# Altium PCB HZSneckV1.2.PcbDoc (part 1 of 2)
Units mm, origin at the board's own origin, x right, y up, seen from the top; angles counter-clockwise.
Board outline 366.25 x 25 mm, 2 copper layers (Top Layer, Bottom Layer), stack 0.251 mm thick; 58 components, 49 nets, 275 pads, 127 vias.
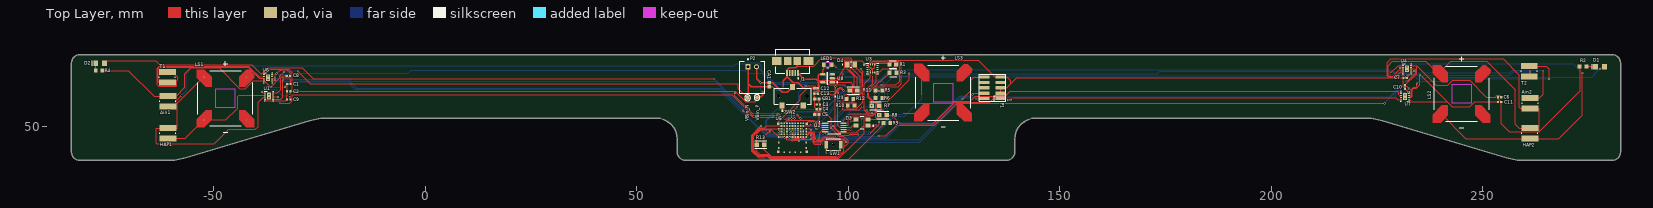
[diagram p0: Top Layer view]
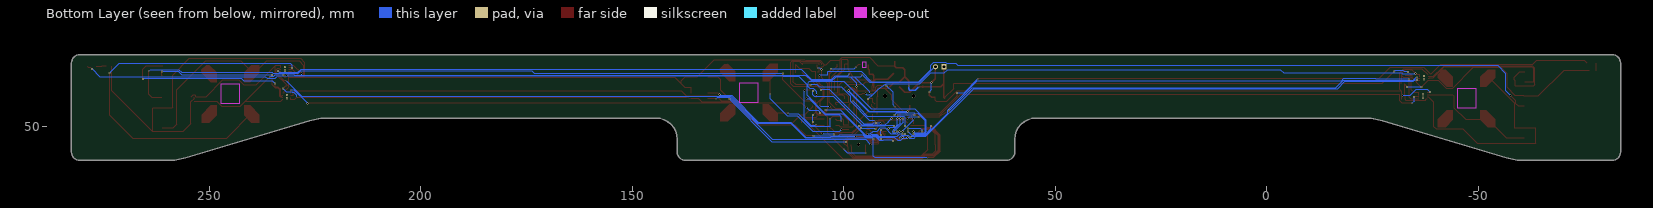
[diagram p1: Bottom Layer view, seen from below]

## Layer stack, top to bottom
Flex Bottom Coverlay: solder mask 0.0254, SM-001, Dk 4
Flex Bottom Coverlay: solder mask 0.025, FC-001, Dk 4
Stiffener 1: core 0.1, Core-009, Dk 4.5
Flex Bottom Coverlay: solder mask 0.012, FC-001, Dk 4
Adhesive 1: prepreg 0.025, PP-001, Dk 3.9
Top Layer: signal copper 0.018
Adhesive 2: prepreg 0.02, PP-001, Dk 3.9
Dielectric 1: dielectric 0.025, FR-4, Dk 4.8
Adhesive 3: prepreg 0.02, PP-001, Dk 3.9
Bottom Layer: signal copper 0.018
Adhesive 4: prepreg 0.025, PP-006, Dk 4.1
Board Layer Stack Bottom Solder: solder mask 0.012, FC-001, Dk 4
Board Layer Stack Bottom Solder: solder mask 0.025, FC-001, Dk 4
Board Layer Stack Bottom Solder: solder mask 0.0254, SM-001, Dk 4

## Board outline
-81.698,41.889 -60.933,41.889 -60.391,41.899 -59.85,41.928 -59.31,41.977 -58.772,42.046 -58.238,42.134 -57.706,42.242 -57.179,42.369 -56.657,42.514 -27.377,51.264 -26.855,51.41 -26.328,51.536 -25.796,51.644 -25.261,51.732 -24.724,51.801 -24.184,51.85 -23.643,51.879 -23.101,51.889 54.535,51.889 55.508,51.793 56.444,51.508 57.307,51.046 58.062,50.425 58.683,49.667 59.144,48.802 59.428,47.864 59.524,46.889 59.524,43.889 59.562,43.499 59.676,43.124 59.86,42.778 60.108,42.475 60.41,42.226 60.755,42.041 61.13,41.927 61.519,41.889 137.347,41.889 137.737,41.927 138.111,42.041 138.456,42.226 138.758,42.475 139.007,42.778 139.191,43.124 139.304,43.499 139.343,43.889 139.343,46.889 139.439,47.864 139.723,48.802 140.184,49.667 140.804,50.425 141.56,51.046 142.422,51.508 143.358,51.793 144.332,51.889 221.967,51.889 222.509,51.879 223.05,51.85 223.59,51.801 224.128,51.732 224.663,51.644 225.194,51.536 225.721,51.41 226.243,51.264 255.523,42.514 256.046,42.369 256.573,42.242 257.104,42.134 257.639,42.046 258.176,41.977 258.716,41.928 259.258,41.899 259.799,41.889 280.564,41.889 280.953,41.927 281.328,42.041 281.673,42.226 281.975,42.475 282.223,42.778 282.408,43.124 282.521,43.499 282.559,43.889 282.559,64.889 282.521,65.279 282.408,65.654 282.223,66 281.975,66.303 281.673,66.552 281.328,66.737 280.953,66.851 280.564,66.889 -81.698,66.889 -82.087,66.851 -82.461,66.737 -82.806,66.552 -83.109,66.303 -83.357,66 -83.541,65.654 -83.655,65.279 -83.693,64.889 -83.693,43.889 -83.655,43.499 -83.541,43.124 -83.357,42.778 -83.109,42.475 -82.806,42.226 -82.461,42.041 -82.087,41.927

## Design rules (kind name [scope] priority, off if disabled: settings)
BoardOutlineClearance [All] p1: gap=0.2 ignorepadtopadclearanceinfootprint=FALSE
Clearance [All] p1: gap=0.1 ignorepadtopadclearanceinfootprint=TRUE
ComponentClearance [All] p1: gap=0.127 collisioncheckmode=3 verticalgap=0.127 showdistances=TRUE
DiffPairsRouting [All] p1: maxlimit=0.254 minlimit=0.127 mostfreqgap=0.127 substack1={524825A5-2011-4F06-AE5B-80F377F077C6} toplayer_{524825a5-2011-4f06-ae5b-80f377f077c6}_minwidth=0.381 toplayer_{524825a5-2011-4f06-ae5b-80f377f077c6}_maxwidth=0.381 toplayer_{524825a5-2011-4f06-ae5b-80f377f077c6}_prefwidth=0.381 bottomlayer_{524825a5-2011-4f06-ae5b-80f377f077c6}_minwidth=0.381 bottomlayer_{524825a5-2011-4f06-ae5b-80f377f077c6}_maxwidth=0.381 bottomlayer_{524825a5-2011-4f06-ae5b-80f377f077c6}_prefwidth=0.381 toplayer_minwidth=0.127 toplayer_maxwidth=25.4 toplayer_prefwidth=0.127 bottomlayer_minwidth=0.127 bottomlayer_maxwidth=25.4 bottomlayer_prefwidth=0.127 maxuncoupledlength=12.7
Height [All] p1: minheight=0 maxheight=1816.048 prefheight=12.7
HoleSize [All] p1: absolutevalues=TRUE maxlimit=6.3 minlimit=0.15 maxpercent=80.000 minpercent=20.000
HoleToHoleClearance [All] p1: gap=0.254 allowstackedmicrovias=FALSE
MinimumAnnularRing [All] p1: minimumring=0.15
MinimumSolderMaskSliver [All] p1: minsoldermaskwidth=0.152
PlaneClearance [All] p1: clearance=0.127
PlaneConnect PlaneConnectPowerPads [InPadClass('PowerPads')] p1: planeconnectstyle=Direct reliefexpansion=0.508 reliefentries=4 reliefconductorwidth=0.254 reliefairgap=0.254
PlaneConnect [All] p2: pad.planeconnectstyle=Relief pad.reliefexpansion=0.3 pad.reliefentries=4 pad.reliefconductorwidth=0.127 pad.reliefairgap=0.127 via.planeconnectstyle=Direct via.reliefexpansion=0.3 via.reliefentries=4 via.reliefconductorwidth=0.127 via.reliefairgap=0.127
PolygonConnect PolygonConnectPowerPads [All vs (InPadClass('PowerPads'))] p1: connectstyle=Direct reliefconductorwidth=0.254 reliefentries=4 polygonreliefangle="90 Angle" airgapwidth=0.254
PolygonConnect [All] p2: thpad.connectstyle=Relief thpad.reliefconductorwidth=0.127 thpad.reliefentries=4 thpad.polygonreliefangle="90 Angle" thpad.airgapwidth=0.127 smdpad.connectstyle=Relief smdpad.reliefconductorwidth=0.127 smdpad.reliefentries=4 smdpad.polygonreliefangle="90 Angle" smdpad.airgapwidth=0.127 via.connectstyle=Direct via.reliefconductorwidth=0.127 via.reliefentries=4 via.polygonreliefangle="90 Angle" via.airgapwidth=0.127
RoutingVias [All] p1: holewidth=0.3 width=0.6 viastyle="Through Hole" minholewidth=0.3 minwidth=0.6 maxholewidth=0.6 maxwidth=6.6
SilkToSilkClearance [All] p1: silktosilkclearance=0.127
SilkToSolderMaskClearance [IsPad] p1: minsilkscreentomaskgap=0.127 clearancetoexposedcopper=TRUE
SolderMaskExpansion [All] p1: expansion=0.051 istentingtop=FALSE
SupplyNets "Schematic Supply Nets_1" [InNet('GND')] p1: voltage=0.000
SupplyNets "Schematic Supply Nets" [InNet('VDD')] p2: voltage=0.000
UnRoutedNet [All] p1: checkbadconnections=TRUE
ViasUnderSMD [HasFootprint('Copy of ISP2053-AX')] p1: allowed=TRUE
Width [All] p1: maxlimit=0.254 minlimit=0.1 preferedwidth=0.1 substack1={524825A5-2011-4F06-AE5B-80F377F077C6}
Width Width_10mil [All] p2: maxlimit=25.4 minlimit=0.254 preferedwidth=0.254 substack1={524825A5-2011-4F06-AE5B-80F377F077C6} minimp=50.000000 maximp=50.000000 favimp=50.000000
Width Width_6mil [All] p3: maxlimit=25.4 minlimit=0.152 preferedwidth=0.152 substack1={524825A5-2011-4F06-AE5B-80F377F077C6} minimp=50.000000 maximp=50.000000 favimp=50.000000
Width Power_20mil [All] p4: maxlimit=25.4 minlimit=0.508 preferedwidth=0.508 substack1={524825A5-2011-4F06-AE5B-80F377F077C6} minimp=50.000000 maximp=50.000000 favimp=50.000000
Width Power_12mil [All] p5: maxlimit=25.4 minlimit=0.305 preferedwidth=0.305 substack1={524825A5-2011-4F06-AE5B-80F377F077C6} minimp=50.000000 maximp=50.000000 favimp=50.000000
Width Width_5mil [All] p6: maxlimit=25.4 minlimit=0.127 preferedwidth=0.127 substack1={524825A5-2011-4F06-AE5B-80F377F077C6} minimp=50.000000 maximp=50.000000 favimp=50.000000
19 further rules are at their usual default settings.

## Classes and differential pairs
differential pair PLT2: +PLT2_P -PLT2_N
differential pair PLT1: +PLT1_P -PLT1_N
differential pair HAP3: +HAP3_P -HAP3_N
differential pair HAP2: +HAP2_P -HAP2_N
differential pair HAP1: +HAP1_P -HAP1_N

## Components (designator, comment, footprint, x,y, rotation, side; value= is the part's Value field where it differs from the comment)
Ain1 "10k Thermistor Custom" "10k Thermistor Pad" -60.9,55.863 r90 top
Ain2 "10k Thermistor Custom" "10k Thermistor Pad" 261.167,55.415 r270 top
C1 "100nF" CAPC0402(1005)60_L#1 -32.259,59.953 r0 top
C2 "100nF" CAPC0402(1005)60_L#1 -32.29,58.227 r0 top
C3 "CAP 100nF 25V 0402(1005)" CAPC0402(1005)60_L#1 92.908,55.105 r180 top value=100nF
C4 "CAP 100nF 25V 0402(1005)" CAPC0402(1005)60_L#1 92.933,53.964 r0 top value=100nF
C5 "1 µF" CAPC1005X56X25ML10T15 92.566,52.762 r0 top
C6 "100nF" CAPC0402(1005)60_L#1 253.951,56.837 r0 top
C7 "100nF" CAPC0402(1005)60_L#1 231.602,61.397 r0 top
C8 "100nF" CAPC0402(1005)60_L#1 -32.384,61.867 r0 top
C9 "100nF" CAPC0402(1005)60_L#1 -32.321,56.313 r0 top
C10 "100nF" CAPC0402(1005)60_L#1 231.571,59.238 r90 top
C11 "100nF" CAPC0402(1005)60_L#1 253.946,55.723 r180 top
C12 "Capacitor 10µF +/-40% 6.3V 0402" CAPC0402(1005)60_L#2 92.367,58.933 r180 top value=10µF
C13 "Capacitor 10µF +/-40% 6.3V 0402" CAPC0402(1005)60_L#2 92.377,57.677 r0 top value=10µF
CA1 "1 µF" CAPC1005X56X25ML10T15 81.278,59.775 r90 top
CB1 "1 µF" CAPC1005X56X25ML10T15 92.568,56.429 r0 top
D1 "150080BS75000" WL-SMCW_0805_150080xx75000 277.685,64.034 r0 top
D2 "150080BS75000" WL-SMCW_0805_150080xx75000 -76.907,64.853 r0 top
D3 "LED RGB" FP-AAA3528LSEKJ3ZGKQBKS-MFG 103.233,50.853 r0 top
D4 "Green LED" LEDC2012X120N 100.611,64.56 r0 top
HAP1 "10k Thermistor Custom" "10k Thermistor Pad" -60.877,48.31 r90 top
HAP2 "10k Thermistor Custom" "10k Thermistor Pad" 261.119,48.281 r90 top
J1 "10104110-0001LF" FCI-10104110-0001LF_V 86.803,63.956 r180 top
LED1 "Red LED" "LED_LS R976_AOS" 95.092,64.543 r180 top
LS1 "HD-LA1307-SM" XDCR_HD-LA1307-SM -47.283,56.538 r0 top
LS2 "HD-LA1307-SM" XDCR_HD-LA1307-SM 244.97,57.617 r0 top
LS3 "HD-LA1307-SM" XDCR_HD-LA1307-SM 122.415,57.885 r0 top
P1 "Pin Header 2x5 SMD, 1.27mm, KS" HDR_2x5-SMD-1.27mm-K 134.072,59.055 r90 top value="Pin Header 2x5, 1.27mm"
P2 "S2B-PH-K-S(LF)(SN)" JST-S2B-PH-K-S_V 77.278,61.572 r0 top
R1 "4.7kΩ" FP-TFCR0603-MFG 110.502,64.54 r0 top
R2 "SG73P1JTTD4700F" RESC1608X55N 273.671,64.101 r180 top value=470
R3 "4.7kΩ" FP-TFCR0603-MFG 110.547,62.6 r0 top
R4 "SG73P1JTTD4700F" RESC1608X55N -77.138,63.13 r0 top value=470
R5 "SG73P1JTTD4700F" RESC1608X55N 107.229,58.434 r0 top value=470
R6 "SG73P1JTTD4700F" RESC1608X55N 107.218,56.669 r0 top value=470
R7 "10kΩ" FP-AC0603-IPC_A 106.395,54.805 r0 top
R8 "10kΩ" FP-AC0603-IPC_A 108.141,52.613 r0 top
R9 "SG73P1JTTD4700F" RESC1608X55N 109.086,50.748 r0 top value=470
R10 "SG73P1JTTD4700F" RESC1608X55N 100.648,54.881 r0 top value=470
R11 "10kΩ" FP-AC0603-IPC_A 101.189,58.432 r0 top
R12 "SG73P1JTTD4700F" RESC1608X55N 100.345,56.438 r0 top value=470
R13 "10kΩ" FP-AC0603-IPC_A 79.236,45.619 r180 top
SW1 "B3U-1000P-B" FP-B3U-1000P-B-MFG 96.453,45.598 r0 top
SW2 "CL-SB-12B-02T" FP-CL-SB-12B-02T-MFG 86.834,57.084 r0 top
T1 "Peltier 1" "10k Thermistor Pad" -60.987,61.536 r270 top
T2 "Peltier 2" "10k Thermistor Pad" 260.962,62.964 r90 top
U1 "DRV8837DSGR" DSG0008A -36.976,57.093 r0 top
U2 "DRV2605LDGST" SOP50P490X110-10N 96.671,49.673 r0 top
U3 "BMI270" XDCR_BMI270 105.725,63.598 r0 top
U4 "DRV8837DSGR" DSG0008A 232.066,63.545 r0 top
U5 "Copy of ISP2053_Pinout_New" "Copy of ISP2053-AX" 86.763,47.232 r0 top
U6 "DRV8837DSGR" DSG0008A -37.211,61.432 r0 top
U7 "DRV8837DSGR" DSG0008A 231.595,56.966 r180 top
U8 "MCP73831T-2ACI/OT" FP-C04-091-OT-IPC_B 95.081,61.288 r180 top
U9 "TPS7A0230PDQNR" IC_TPS7A0230PDQNR 97.235,58.261 r90 top
VBin_N "TP_SMD_Ø1.0MM" TP_SMD_Ø1.0mm 76.158,56.684 r90 top value=Ø1.0mm,SMD
VBin_P "TP_SMD_Ø1.0MM" TP_SMD_Ø1.0mm 78.389,56.763 r90 top value=Ø1.0mm,SMD

## Footprints (in the part's own frame and the unit in brackets; to place one, negate y for a bottom-side part, rotate by r counter-clockwise, add the part's x,y. Pads: shape width x height; smd on the part's side, far side on the other; paste and mask are expansions set on the pad)
"10k Thermistor Pad" [mm] "Custom Made FootPrint"
  rect 1.45x4 smd: 1(-1.225,0) 2(1.225,0)
  silkscreen extent -0.1,-1.9 0.1,1.9, body extent -1.57,-2 1.57,2, height 0.26
CAPC0402(1005)60_L#1 [mm] "Chip Capacitor, Body 1.0x0.5mm, Height 0.6mm, IPC High Density"
  rect 0.52x0.52 smd: 1(-0.4,0) 2(0.4,0)
  body extent -0.55,-0.3 0.55,0.3, height 0.6
CAPC0402(1005)60_L#2 [mm] "Chip Capacitor, Body 1.0x0.5mm, Height 0.6mm, IPC High Density"
  rrect25% 0.5x0.55 smd: 1(-0.45,0) 2(0.45,0)
  silkscreen extent 0,-0.2 0,0.2, body extent -0.5,-0.25 0.5,0.25, height 0.6
CAPC1005X56X25ML10T15 [mm] "Chip Capacitor, 2-Leads, Body 1.00x0.50mm, IPC Low Density"
  rect 0.78x0.74 smd: 1(-0.49,0) 2(0.49,0)
  body extent -0.55,-0.3 0.55,0.3, height 0.56
"Copy of ISP2053-AX" [mm] "Insight SiP BLE module all pins"
  rect 0.6x0.6 smd mask+0: A1(-3.35,3.35) A11(3.35,3.35) L1(-3.35,-3.35) L11(3.35,-3.35)
  rect 0.4x0.4 smd mask+0: A2(-2.6,3.45) A3(-1.95,3.45) A4(-1.3,3.45) A5(-0.65,3.45) A6(0,3.45) A7(0.65,3.45) A8(1.3,3.45) A9(1.95,3.45) A10(2.6,3.45) B2(-2.6,2.8) B3(-1.95,2.8) B4(-1.3,2.8) B5(-0.65,2.8) B6(0,2.8) B7(0.65,2.8) B8(1.3,2.8) B9(1.95,2.8) B10(2.6,2.8) C1(-3.25,2.15) C2(-2.6,2.15) C3(-1.95,2.15) C4(-1.3,2.15) C5(-0.65,2.15) C6(0,2.15) C7(0.65,2.15) C8(1.3,2.15) C9(1.95,2.15) C10(2.6,2.15) C11(3.25,2.15) D1(-3.25,1.5) D2(-2.6,1.5) D3(-1.95,1.5) D4(-1.3,1.5) D5(-0.65,1.5) D6(0,1.5) D7(0.65,1.5) D8(1.3,1.5) D9(1.95,1.5) D10(2.6,1.5) D11(3.25,1.5) E1(-3.25,0.85) E2(-2.6,0.85) E3(-1.95,0.85) E4(-1.3,0.85) E5(-0.65,0.85) E6(0,0.85) E7(0.65,0.85) E8(1.3,0.85) E9(1.95,0.85) E10(2.6,0.85) E11(3.25,0.85) F1(-3.25,0.2) F2(-2.6,0.2) F3(-1.95,0.2) F4(-1.3,0.2) F5(-0.65,0.2) F6(0,0.2) F7(0.65,0.2) F8(1.3,0.2) F9(1.95,0.2) F10(2.6,0.2) F11(3.25,0.2) H1(-3.25,-1.1) H11(3.25,-1.1) K1(-3.25,-2.4) K11(3.25,-2.4) L3(-1.95,-3.45) L5(-0.65,-3.45) L7(0.65,-3.45) L9(1.95,-3.45)
  body extent -4.01,-4.01 4.01,4.01, height 0.25
DSG0008A [mm]
  rect 0.5x0.25 smd paste+0 mask+0.051: 1(-0.95,0.75) 2(-0.95,0.25) 3(-0.95,-0.25) 4(-0.95,-0.75) 5(0.95,-0.75) 6(0.95,-0.25) 7(0.95,0.25) 8(0.95,0.75)
  rect 0.9x1.6 smd paste-0.45 mask+0.051: 9(0,0)
  round 0.5 / inner round 1.524 / far side round 0.5 hole 0.203 paste-2539.97 mask+0.076: V(0,-0.4) V(0,0.4)
  silkscreen extent -1.08,-1.15 1.07,1.15, body extent -1,-1 1,1, height 0.77
FCI-10104110-0001LF_V [mm] "SMD, 5-Leads, Body 8.06x5.6mm, Pitch 0.65mm"
  rect 0.4x1.4 smd: 1(-1.3,1.425) 2(-0.65,1.425) 3(0,1.425) 4(0.65,1.425) 5(1.3,1.425)
  rect 1.8x1.9 smd: 6(-1.15,-1.425) 7(1.15,-1.425)
  rect 2.3x1.9 smd: 8(-3.75,-1.425) 9(3.75,-1.425)
  silkscreen extent -4.03,-4.18 4.03,2.8, body extent -4.03,-4.17 4.03,1.43, height 2.95
FP-AAA3528LSEKJ3ZGKQBKS-MFG [mm]
  rect 1.2x0.9 smd paste+0 mask+0: 1(1.4,-0.725) 2(-1.4,-0.725) 3(-1.4,0.725) 4(1.4,0.725)
  silkscreen extent -0.42,-1.5 2.75,1.5, body extent -2.1,-1.6 2.1,1.6, height 0.25
FP-AC0603-IPC_A [mm]
  rect 1.059x1.012 smd paste+0 mask+0: 1(-0.877,0) 2(0.877,0)
  silkscreen extent -1.41,-0.91 1.41,0.91, body extent -1.91,-1.01 1.91,1.01, height 0.25
FP-B3U-1000P-B-MFG [mm]
  rect 0.8x1.7 smd paste+0 mask+0: 1(-1.7,0) 2(1.7,0)
  round 0.75 hole 0.75 unplated paste-2539.97 mask+0: ""(0,0)
  silkscreen extent -1.6,-1.35 1.6,1.35, body extent -2.2,-1.45 2.2,1.45, height 0.25
FP-C04-091-OT-IPC_B [mm]
  rect 1.338x0.578 smd paste+0 mask+0: 1(-1.116,0.95)
  rrect100% 1.338x0.578 smd paste+0 mask+0: 2(-1.116,0) 3(-1.116,-0.95) 4(1.116,-0.95) 5(1.116,0.95)
  silkscreen extent -2.41,-1.45 0.05,1.45
FP-CL-SB-12B-02T-MFG [mm]
  rect 1.2x1.4 smd paste+0 mask+0: 1(-2.5,-2.2) 2(0,2.2) 3(2.5,-2.2)
  round 0.9 hole 0.9 unplated paste-2539.97 mask+0: ""(-3.4,0) ""(3.4,0)
  silkscreen extent -4.4,-3.57 4.4,1.9, body extent -4.5,-3 4.5,3, height 0.25
FP-TFCR0603-MFG [mm]
  rect 1x1 smd paste+0 mask+0: 1(-0.8,0) 2(0.8,0)
  silkscreen extent -0.83,-0.9 0.82,0.9, body extent -1.4,-0.6 1.4,0.6, height 0.25
HDR_2x5-SMD-1.27mm-K [mm]
  rect 0.76x2.4 smd: 1(-2.54,-1.95) 2(-2.54,1.95) 3(-1.27,-1.95) 4(-1.27,1.95) 5(0,-1.95) 6(0,1.95) 7(1.27,-1.95) 8(1.27,1.95) 9(2.54,-1.95) 10(2.54,1.95)
  silkscreen extent -3.17,-3.15 3.18,3.15, body extent -3.14,-2.92 3.14,2.92, height 6.11
IC_TPS7A0230PDQNR [mm]
  rect 0.05x0.05 smd paste-1 mask+0: 1(-0.43,0.325) 2(-0.43,-0.325) 3(0.43,-0.325) 4(0.43,0.325) 5(0,0)
  Top Layer region: 0.66,0.17 0.43,0.17 0.2,0.4 0.2,0.48 0.66,0.48
  Top Layer region: -0.2,0.4 -0.43,0.17 -0.66,0.17 -0.66,0.48 -0.2,0.48
  Top Layer region: 0.41,0 0,-0.41 -0.41,0 0,0.41
  Top Layer region: -0.2,-0.4 -0.2,-0.48 -0.66,-0.48 -0.66,-0.17 -0.43,-0.17
  Top Layer region: 0.66,-0.48 0.2,-0.48 0.2,-0.4 0.43,-0.17 0.66,-0.17
  silkscreen extent -1.36,0.23 -1.16,0.42, body extent -0.5,-0.5 0.5,0.5, height 0.4
JST-S2B-PH-K-S_V [mm] "THD, 2-Leads, Body 7.6x5.9mm, Pitch 2mm"
  rect 1.2x1.2 hole 0.7: 1(-1,2.45)
  round 1.2 hole 0.7: 2(1,2.45)
  silkscreen extent -2.95,-3.8 2.95,4.35, body extent -2.95,-3.8 2.95,3.8, height 4.8
"LED_LS R976_AOS" [mil]
  rect 34x43 smd paste+0 mask+0: 1(-36.5,0) 2(36.5,0)
  Top Layer keep-out region: -17.5,-23.5 -17.5,23.5 17.5,23.5 17.5,-23.5
  Keep-Out Layer region: -17.5,-23.5 -17.5,23.5 17.5,23.5 17.5,-23.5
  silkscreen extent -10,-30 10,31, body extent -39,-26 39,26, height 32
LEDC2012X120N [mm]
  rect 1.1x1.45 smd: A(0.9,0) C(-0.9,0)
  silkscreen extent -2.1,-0.6 0.2,0.6, body extent -1,-0.65 1,0.65, height 0.9
RESC1608X55N [mm]
  rect 0.89x0.93 smd: 1(-0.814,0) 2(0.814,0)
  body extent -0.8,-0.4 0.8,0.4, height 0.55
SOP50P490X110-10N [mm]
  rrect25% 1.47x0.28 smd: 1(-2.15,1) 2(-2.15,0.5) 3(-2.15,0) 4(-2.15,-0.5) 5(-2.15,-1) 6(2.15,-1) 7(2.15,-0.5) 8(2.15,0) 9(2.15,0.5) 10(2.15,1)
  silkscreen extent -3.6,-1.5 1.5,1.5, body extent -2.45,-1.5 2.45,1.5, height 1.1
TP_SMD_Ø1.0mm [mm]
  round 1 smd paste-5: 1(0,0)
  silkscreen extent -0.7,-0.7 0.7,0.7
WL-SMCW_0805_150080xx75000 [mm] "SMD Mono-color Chip LED, body 2.0x1.25mm"
  rect 1.1x1.3 smd: 1(-1.05,0) 2(1.05,0)
  silkscreen extent -2,-0.6 -1.8,0.6, body extent -1,-0.63 1,0.62, height 0.7
XDCR_BMI270 [mm]
  rect 0.475x0.25 smd: 1(-1.162,0.75) 2(-1.162,0.25) 3(-1.162,-0.25) 4(-1.162,-0.75) 8(1.163,-0.75) 9(1.163,-0.25) 10(1.163,0.25) 11(1.163,0.75)
  rect 0.25x0.475 smd: 5(-0.5,-0.912) 6(0,-0.912) 7(0.5,-0.912) 12(0.5,0.913) 13(0,0.913) 14(-0.5,0.913)
  silkscreen extent -2.07,-1.25 1.5,1.25, body extent -1.5,-1.25 1.5,1.25, height 0.87
XDCR_HD-LA1307-SM [mm]
  rect 0.1x0.1 smd paste-1 mask+0: N1(-5.08,-5.08) N2(5.08,-5.08) P1(-5.08,5.08) P2(5.08,5.08)
  Top Layer region: -3.25,-5.07 -4.98,-6.8 -6.8,-6.8 -6.8,-4.88 -4.67,-2.75 -3.25,-2.75
  Top Layer region: 6.8,-4.88 6.8,-6.8 4.98,-6.8 3.25,-5.07 3.25,-2.75 4.67,-2.75
  Top Layer region: 5.755,6.75 6.85,5.655 6.8,4.88 4.67,2.75 3.25,2.75 3.25,5.07 4.98,6.8
  Top Layer region: -3.25,5.07 -3.25,2.75 -4.67,2.75 -6.8,4.88 -6.8,6.8 -4.98,6.8
  Keep-Out Layer region: 2.25,-2.25 -2.25,-2.25 -2.25,2.25 2.25,2.25
  silkscreen extent -6.5,-8 6.5,8.75, body extent -6.5,-6.5 6.5,6.5, height 7.25

## Part data
Ain1 Ain2 HAP1 HAP2 T1 T2: library part CMP-00000-1, "Custom Pad for the Thermistor"
C1 C2 C3 C4 C6 C7 C8 C9 C10 C11: library part CMP-1034-02073-1, "CAP 100nF 25V ±20% 0402 (1005 Metric) Thickness 0.6mm SMD", Case-EIA=0402, Case-Metric=1005, Rated Voltage="25 V", Tolerance=Â±20%, Max Thickness="0.6 mm", Technology=SMT
C5 CA1 CB1: library part CMP-2008-02745-1, "1 µF ±10% 6.3V Ceramic Capacitor X5R 0402 (1005 Metric) / 04026D105KAT4A", Manufacturer="AVX Interconnect / Elco", Part Number=04026D105KAT4A
C12 C13: library part CMP-001-00074-3, "Chip Capacitor, 10µF +/-40%, 6.3V, 0402, Thickness 0.6 mm", Case/Package=0402, Max Operating Temperature=85°C, Min Operating Temperature=-55°C, Tolerance=10%, Voltage Rating=6.3V, Mounting Technology=SMT, Pins=2
D1 D2: library part CMP-1426-00008-7, "Led, Blue, 470 Nm, 3.2 V, 30 Ma, 145 Mcd Rohs Compliant: Yes", Case Code (Imperial)=0805, Case Code (Metric)=2012, Color=Blue, Forward Current=100mA, Forward Voltage=3.2V, Max Junction Temperature (Tj)=95°C, Max Operating Temperature=85°C, Max Reverse Voltage (DC)=5V, Min Operating Temperature=-40°C, Power Dissipation=105mW, Test Current=20mA, Case/Package=0805, Dominant Wavelength=470nm, Height=700µm, Lead Free="Lead Free", Length=2mm, Lens Style="Clear, Rectangular", Luminous Intensity=145mcd, Mount="Surface Mount", Packaging="Tape and Reel", Peak Wavelength=465nm, REACH SVHC=Unknown, Reverse Voltage=5V, RoHS=Compliant, Viewing Angle=140°, Wavelength=470nm, Width=1.25mm
D3: library part CMP-44529-000057-1, "LED RGB CLEAR 4SMD / AAA3528LSEKJ3ZGKQBKS", Case/Package=PLCC, Color=Blue, Forward Voltage=2.7V, Lens Color=Colorless, Test Current=2mA, Dominant Wavelength=465nm, Height=2.1mm, Length=3.2mm, Lens Transparency=Clear, Luminous Intensity=30mcd, Mount="Surface Mount", Packaging="Tape and Reel", RoHS Compliant=Yes, Viewing Angle=120°, Width=2.8mm
D4: library part CMP-004-00034-1, "Green LED, 565 nm 0805Diffused, Rectangle Lens SMD package / SML-LXT0805GW-TR", Case/Package="0805 Lumex", Check_prices=https://www.snapeda.com/parts/SML-LXT0805GW-TR/Lumex/view-part/?ref=eda, Component Type=Standard, Design Item ID=SML-LXT0805GW-TR, MF="Lumex Opto/Components", MP=SML-LXT0805GW-TR, Pins=2, SnapEDA_Link=https://www.snapeda.com/parts/SML-LXT0805GW-TR/Lumex/view-part/?ref=snap, Source=SML-LXT0805GW-TR.SchLib
J1: library part CMP-2000-05823-1, "Micro USB, Receptacle, -55 to 85 degC, 5-Pin SMD, RoHS, Tape and Reel", Manufacturer="FCI Electronics", Package Description="5-Pin Surface Mount Device, Body 8.06 x 5.6 mm, Pitch 0.65 mm", Connector Mounting=PCB, Connector Type=USBMicroB, Contact Plating=Gold, Contact Termination=SurfaceMountRightAngle, Datasheet URL=http://portal.fciconnect.com/Comergent//fci/drawing/10104110.pdf, Datasheet Version="Rev. C, 03/2011", Gender=Receptacle, Manufacturer URL=http://portal.fciconnect.com/, Mounting Technology=SurfaceMount, No. of Contacts=5, Package Reference=10104110-0001LF
LED1: library part CMP-007-00038-1, "LS R976-NR-1", Manufacturer_Name="ams OSRAM", Copyright="Copyright (C) 2025 Ultra Librarian. All rights reserved.", Design Item ID="LS R976-NR-1", Manufacturer_Part_Number="LS R976-NR-1", Source=LSR976-NR-1.SchLib
LS1 LS2 LS3: library part CMP-052-000000-1, "13X13MM LRA HAPTIC 154HZ", Package=None, Check_prices=https://www.snapeda.com/parts/HD-LA1307-SM/PUI+Audio/view-part/?ref=eda, Component Type=Standard, Design Item ID=HD-LA1307-SM, MF="PUI Audio, Inc.", MP=HD-LA1307-SM, Pin Count=4, SnapEDA_Link=https://www.snapeda.com/parts/HD-LA1307-SM/PUI+Audio/view-part/?ref=snap, Source=HD-LA1307-SM.SchLib
P1: library part CMP-002-00075-1, "Pin Header 2x5, 1.27mm (50mil), SMD, Keying Shroud", Manufacturer=W-CON, Manufacturer Part Number=3132-10MS0BK00R1, Part number IPS=00000009968, Artikkelnr Noca=55010009, Component Class=Connectors, Component Type=Standard, ComponentLink1Description=Datasheet, ComponentLink1URL=N.A., ComponentLink2Description="Supplier link", ComponentLink2URL=N.A., Design Item ID="Pin Header 2x5 SMD, 1.27mm, KS", Footprint Doc=HDR_2x5-SMD-1.27mm, HelpURL=\\hizz\pro\app9717\Datasheet\connectors\W-CON\3132-XXMXXBK00XX.pdf, LatestRevisionDate=2016-04-21, Note=N.A., Pad Count=10, Part Number="Pin Header 2x5 SMD, 1.27mm, KS", PartId=100500261, Pins=10, Published=2016-01-22, Publisher="Nordic Semiconductor", Source=pca10095.SCHLIB
P2: library part CMP-1755-00004-1, "Male Header, Pitch 2 mm, 1 x 2 Position, Height 4.8 mm, Tail Length 3.4 mm, -25 to 85 degC, RoHS, Bulk", Capacitance="10 uF", Case\Package=Radial, Max Operating Temperature="85 degC", Min Operating Temperature="-40 degC", Package Quantity=200, Tolerance=20%, Voltage Rating="50 V", ComponentLink1Description=Datasheet, ComponentLink1URL=http://www.jst-mfg.com/product/pdf/eng/ePH.pdf, DatasheetVersion=Dec-12, Diameter="5 mm", Height="11 mm", Lead Pitch="2 mm", Length="11 mm", Mount="Through Hole", PackageDescription="Male Header, Pitch 2 mm, 1 x 2 Position, Height 4.8 mm, Tail Length 3.4 mm", PackageReference=S2B-PH-K-S, Packaging=Bulk, Pins=2, Radiation Hardening=No, REACH SVHC="No SVHC", RoHSCompliant=true, Voltage Rating (DC)="50 V"
R1 R3: library part CMP-250906-225181-1, "RES Thin Film,  4.7kΩ, 1%, 0.1W, 50ppm/°C, 0603TFCR0603-10W-C-4701FT-1K"
R2 R4 R5 R6 R9 R10 R12: library part CMP-009-00201-2, "RESISTOR, SURGE, 470 OHM 1% 0603", Case/Package=None, Availability=Unavailable, Component Type=Standard, Design Item ID=SG73P1JTTD4700F, MP=SG73P1JTTD4700F, Pins=2, Price=None, Source=SG73P1JTTD4700F.SchLib
R7 R8 R11 R13: library part CMP-03412-040683-1, "RES 10kΩ 5.00% 0.2W 0603 / AC0603JR-7W10KL"
SW1: library part CMP-08834-000005-1, "SWITCH TACTILE SPST-NO 0.05A 12V", Ambient Temperature Range High=+70°C, Ambient Temperature Range Low=-25°C, Contact Current Rating=50mA, Contact Resistance=100mΩ, Manufacturer=Omron, Operating Force=1.5N, Package=0, Temperature="-25°C to +70°C", Voltage Rating Dc=12V, Automotive=No, Category=Switch, ComponentLink2Description=Datasheet, ComponentLink2URL=https://omronfs.omron.com/en_US/ecb/products/pdf/en-b3u.pdf, Device Class L1=Electromechanical, Device Class L2=Switches, Device Class L3="Tactile Switches", Digikey Description="SWITCH TACTILE SPST-NO 0.05A 12V", Electromechanical Life=200000Cycles, Height=1.75mm, Lead Free=Yes, Manufacturer Part Number=B3U-1000P-B, Mount="Surface Mount", Mouser Description="Tactile Switches Top Actuated with boss w/o ground", Octopart=https://octopart.com/b3u-1000p-b-omron-1057356, RoHS=TRUE, Temperature Range High=+70°C, Temperature Range Low=-25°C, Throw Configuration=SPST-NO
SW2: library part CMP-71745-000009-1, "SWITCH SLIDE SPDT 200MA 12V", Current Rating=200mA, Max Operating Temperature=85°C, Min Operating Temperature=-40°C, Operating Force=153gf, Voltage Rating (DC)=12V, Actuator Length=2mm, Actuator Material=Nylon, Actuator Type=Standard, Contact Material=Copper, Contact Plating=Gold, Contact Style=Non-Shorting, Electrical Life=10000Cycles, Mount="Surface Mount", Packaging="Cut Tape", RoHS Compliant=Yes, Series=CL-SB, Switch Function=On-On, Switch Travel=2mm, Termination="Gull Wing", Throw Configuration=SPDT
U1 U4 U6 U7: library part CMP-037-000001-3, "12-V, 1.8-A H-bridge motor driver 8-WSON -40 to 85", Manufacturer_Name="Texas Instruments", Copyright="Copyright (C) 2025 Ultra Librarian. All rights reserved.", Datasheet=https://www.ti.com/lit/gpn/drv8837, Design Item ID=DRV8837DSGR, Manufacturer_Part_Number=DRV8837DSGR, RefDes=RefDes, Source=DRV8837DSGR.SchLib, TYPE=TYPE
U2: library part CMP-039-000000-1, "Haptic driver for ERM/LRA with 2-V operation, waveform library & auto-resonance tracking", Package="VSSOP-10 Texas Instruments", Check_prices=https://www.snapeda.com/parts/DRV2605LDGST/Texas+Instruments/view-part/?ref=eda, Component Type=Standard, Design Item ID=DRV2605LDGST, MF="Texas Instruments", MP=DRV2605LDGST, Pin Count=9, SnapEDA_Link=https://www.snapeda.com/parts/DRV2605LDGST/Texas+Instruments/view-part/?ref=snap, Source=DRV2605LDGST.SchLib
U3: library part CMP-027-000000-1, "Accelerometer, Gyroscope, 6 Axis Sensor IÂ²C, SPI Output", Package="LGA-14 Bosch Sensortec", Check_prices=https://www.snapeda.com/parts/BMI270/Bosch+Sensortec/view-part/?ref=eda, Component Type=Standard, Design Item ID=BMI270, Digi-Key_Part_Number=828-1091-2-ND, MF="Bosch Sensortec", MP=BMI270, Pin Count=14, Purchase-URL=https://pricing.snapeda.com/search/part/BMI270/?ref=eda, SnapEDA_Link=https://www.snapeda.com/parts/BMI270/Bosch+Sensortec/view-part/?ref=snap, Source=BMI270.SchLib
U5: library part CMP-020-00023-1, "ISP Smart Bluetooth Module", BOI="QFN 8 x 8", BOI-Metric="QFN 8 x 8", Component Type=Standard, DESIG="BLE Module", Design Item ID=ISP2053_Pinout_New, FAB="Insight SiP", ISP_PART=ISP1807, Pin Count=74, Source=ISPlibSch.SchLib
U8: library part CMP-0133-00143-2, "IC CONTROLLR LI-ION 4.2V SOT23-5", Case/Package=SOT-23, Drain to Source Resistance=350mR, Max Charge Current=500mA, Max Input Voltage=6V, Max Operating Temperature=85°C, Max Output Voltage=4.5V, Max Power Dissipation=1.54W, Min Operating Temperature=-40°C, Min Output Voltage=4.168V, Min Supply Voltage=3.75V, Output Voltage=4.2V, Voltage Rating=4.534V, Contact Plating=Tin, Height=0.051inch, Lead Free="Lead Free", Length=0.122inch, Max Supply Voltage=6V, Mount="Surface Mount", Number of Cells=1, Number of Channels=1, Number of Outputs=1, Number of Pins=5, Output Current=500mA, Packaging="Tape and Reel", Radiation Hardening=No, REACH SVHC="No SVHC", Termination=SMD/SMT, Weight=0.00709oz, Width=0.071inch
U9: library part CMP-035-000000-1, "200-mA, nanopower-IQ (25 nA), low-dropout (LDO) voltage regulator with enable", Package="X2SON-4 Texas Instruments", Check_prices=https://www.snapeda.com/parts/TPS7A0230PDQNR/Texas+Instruments/view-part/?ref=eda, Component Type=Standard, Design Item ID=TPS7A0230PDQNR, MF="Texas Instruments", MP=TPS7A0230PDQNR, Pin Count=5, SnapEDA_Link=https://www.snapeda.com/parts/TPS7A0230PDQNR/Texas+Instruments/view-part/?ref=snap, Source=TPS7A0230PDQNR.SchLib
VBin_N VBin_P: library part CMP-017-000001-1, "1.0mm circular SMD testpad", Manufacturer="Nordic Semiconductor", Manufacturer Part Number=N.A., Artikkelnr Noca=N.A., Component Class=Connectors, Component Type="Standard (No BOM)", ComponentLink1Description=Datasheet, ComponentLink1URL=N.A., ComponentLink2Description="Supplier link", ComponentLink2URL=N.A., Design Item ID=TP_SMD_Ø1.0MM, Footprint Doc=TP_SMD_Ø1.0mm, HelpURL=N.A., LatestRevisionDate=2013-06-11, Note=N.A., Pad Count=1, Part Number=TP_SMD_Ø1.0MM, Part number IPS=N.A., PartId=100500475, Pin Count=1, Published=2013-06-11, Publisher="Nordic Semiconductor", Source=pca10095.SCHLIB

## Via types
v1: diameter 0.45, hole 0.15, Top Layer to Bottom Layer, 113 vias
v2: diameter 0.15/0.45 (per signal layer), hole 0.15, Top Layer to Bottom Layer, 14 vias

## Nets (pads, with @x,y where several pads share a name; then routed paths per layer and width w, separated by ;. In a path a pad name is that pad's centre, name@x,y a point inside that pad or via, vN(x,y) a via of type N, cw(c..) or ccw(c..) an arc to the next point about the centre after c; other vN are vias at no path point)
A0: Ain1.1 R7.1 U5.B4 | length 211.9
  Top Layer w0.1: Ain1.1@-60.9,54.638 -59.625,54.638 -58.95,55.313 -58.95,55.968 v1(-57.721,57.197) ; v1(97.846,55.974) 98.714,55.106 98.714,53.887 98.772,53.828 102.584,53.828 v1(103.324,54.568) ; v1(105.519,54.805) 105.519,55.904 104.612,56.811 104.612,59.006 105.766,60.16 105.766,61.98 v1(105.763,61.983)
  Bottom Layer w0.1: v1(-57.721,57.197) -56.56,58.358 -56.56,62.416 -54.73,64.246 72.847,64.246 73.346,64.745 75.551,64.745 75.605,64.799 75.643,64.799 75.851,65.007 78.802,65.007 79.445,64.364 79.445,63.335 82.367,60.413 93.31,60.413 95.765,62.868 103.679,62.868 103.738,62.809 103.738,62.042 103.797,61.983 v1(105.763,61.983) ; v2(85.463,50.032) 85.463,51.989 85.684,52.21 94.248,52.21 96.08,54.042 96.08,54.208 v1(97.846,55.974) ; v1(103.324,54.568) 105.282,54.568 v1(105.519,54.805)
A1: Ain2.1 R8.1 U5.B8 | length 198.2
  Top Layer w0.1: v1(96.378,50.03) 96.408,50.03 96.71,49.728 96.71,49.435 98.318,47.827 100.166,47.827 100.356,48.017 v1(102.3,48.017) ; v1(104.99,48.186) 107.249,50.446 v1(107.249,50.999) ; 106.593,55.268 106.593,53.253 106.623,53.223 106.785,53.069 R8.1@107.264,52.613 v1(107.249,52.597) ; 106.593,55.269 106.59,55.398 106.578,55.672 106.578,55.755 106.637,55.813 109.245,55.813 114.36,60.928 v1(114.36,62.391) ; Ain2.1@261.167,56.64 263.387,56.64 264.262,57.515 v1(264.262,63.022)
  Bottom Layer w0.1: v2(88.063,50.032) 88.078,50.047 90.116,50.047 90.221,49.942 92.478,49.942 92.532,49.996 96.344,49.996 v1(96.378,50.03) ; v1(102.3,48.017) 104.756,48.017 104.925,48.186 v1(104.99,48.186) ; v1(107.249,50.999) v1(107.249,52.597) ; v1(114.36,62.391) 173.056,62.391 173.606,62.941 228.475,62.941 228.993,62.423 234.782,62.423 234.957,62.598 256.367,62.598 257.019,63.25 263.96,63.25 264.188,63.022 v1(264.262,63.022)
GND: Ain1.2 Ain2.2 C1.1 C2.1 C3.1 C4.1 C5.1 C6.1 C7.1 C8.1 C9.1 C10.1 C11.1 C12.2 C13.1 CA1.1 CB1.1 D3.2 D4.C J1.5 J1.6 P1.3 P1.5 P1.9 P2.1 R2.2 R4.2 R11.2 R13.2 U1.4 U2.8 U3.1 U3.6 U3.7 U4.4 U5.A1 U5.A11 U5.E7 U5.F1 U5.F6 U5.F9 U5.F11 U6.4 U7.4 U8.2 U9.2 U9.5 VBin_N.1 | length 616.9
  Top Layer w0.1: R4.2@-76.324,63.13 -70.197,63.13 -64.155,57.088 Ain1.2@-60.9,57.088 -60.804,57.184 -58.809,57.184 -56.864,59.128 -56.864,62.335 -55.466,63.733 -48.788,63.733 -43.84,58.785 -42.57,58.785 -40.673,60.682 U6.4@-38.161,60.682 -38.075,60.682 v1(-36.609,59.217) -34.383,61.443 -34.383,61.867 ; U1.4@-37.926,56.343 -37.592,56.343 -37.592,55.976 -33.058,55.976 C9.1@-32.721,56.313 -32.721,57.236 -32.69,57.267 C2.1@-32.69,58.227 -32.69,59.014 -32.659,59.217 C1.1@-32.659,59.783 ; v1@-33.47,62.805 v1(-33.47,62.78) -34.383,61.867 ; v1(-33.204,59.238) -33.137,59.305 -33.137,59.475 -32.829,59.783 C1.1@-32.659,59.783 ; C8.1@-32.784,61.867 -34.383,61.867 ; C1.1@-32.659,59.953 C1.1@-32.659,59.783 ; v1(-30.145,62.938) -27.253,60.046 74.017,60.046 74.017,58.825 VBin_N.1@76.158,56.684 ; R13.2@78.314,45.688 78.314,48.189 79.287,49.162 81.143,49.162 81.144,49.163 81.782,49.163 U5.F1@83.513,47.432 ; R13.2@78.36,45.619 78.172,45.431 78.172,44.133 79.021,43.284 80.983,43.284 81.688,42.579 97.47,42.579 98.92,44.029 98.92,44.986 99.028,45.094 ; U5.A1@83.413,50.582 83.413,51.032 83.511,51.13 83.52,51.13 88.595,56.205 88.595,57.231 90.297,58.933 ; U5.E7@87.413,48.082 87.391,48.082 86.763,47.454 U5.F6@86.763,47.432 87.113,47.082 88.363,47.082 U5.F9@88.713,47.432 88.863,47.282 88.954,47.282 89.013,47.223 89.013,47.17 89.101,47.082 89.625,47.082 89.713,47.17 89.713,47.223 89.772,47.282 89.863,47.282 U5.F11@90.013,47.432 90.864,48.283 91.372,48.283 91.591,48.063 91.591,48.046 91.634,48.003 91.634,47.367 91.89,47.111 91.89,46.11 91.949,46.051 93.46,46.051 94.192,46.783 96.198,46.783 98.861,46.783 99.028,46.616 99.028,45.094 ; 87.953,64.183 91.783,64.183 93.751,66.151 100.457,66.151 100.811,65.797 100.811,65.44 ; U5.A11@90.113,50.582 90.631,51.1 91.819,51.1 91.936,50.983 91.936,49.859 v1(92.448,49.347) ; 91.918,58.291 91.927,58.291 91.927,58.261 C13.1@91.927,57.677 91.927,57.107 92.078,56.956 CB1.1@92.078,56.429 92.078,54.419 C4.1@92.533,53.964 ; C5.1@92.076,52.762 92.076,53.349 93.147,53.349 ; C3.1@93.308,55.105 93.308,54.739 C4.1@92.533,53.964 ; U8.2@96.197,61.288 97.573,61.288 97.616,61.331 98.977,63.623 98.991,63.647 98.991,63.675 98.977,64.636 ; U9.5@97.235,58.261 97.235,58.156 U9.2@97.56,57.831 97.434,57.705 97.434,50.156 97.917,49.673 U2.8@98.821,49.673 100.626,49.673 101.081,50.128 D3.2@101.833,50.128 ; R11.2@102.066,58.432 102.066,61.477 100.432,63.112 100.432,65.694 99.022,65.694 98.993,65.665 98.963,65.635 98.963,65.593 98.977,64.636 ; U3.7@106.225,62.686 U3.6@105.725,62.686 105.725,63.551 105.33,63.946 105.075,63.946 104.75,64.271 104.75,64.274 104.675,64.349 U3.1@104.546,64.349 ; P1.3@136.022,57.785 P1.5@136.022,59.055 137.43,59.055 138.43,60.055 ; U7.4@232.545,57.716 232.207,57.716 232.207,58.202 C10.1@231.571,58.838 231.14,59.269 231.14,60.055 231.202,60.117 C7.1@231.202,61.397 ; C6.1@253.551,56.837 253.551,56.518 C11.1@254.346,55.723 254.346,50.53 256.251,48.625 263.271,48.625 ; R2.2@272.996,64.101 272.996,58.35 263.271,48.625 ; C4.1@92.533,53.964 93.147,53.349 ; 93.147,53.349 94.285,53.349 95.909,51.725 v1(95.909,49.52) 97.802,47.627 98.769,47.627 99.913,46.483 99.913,45.979 99.028,45.094 ; 98.977,64.636 99.635,64.636 D4.C@99.711,64.56 99.711,63.468 101.371,61.808 101.371,57.769 102.768,57.769 102.768,61.679 100.811,63.636 100.811,65.44 ; 100.811,65.44 103.176,65.44 104.267,64.349 U3.1@104.546,64.349 ; U3.1@104.546,64.349 104.546,64.5 105.436,65.39 108.985,65.39 109.185,65.59 130.752,65.59 134.747,61.595 P1.9@136.022,61.595 137.525,61.595 138.43,60.69 138.43,60.055 ; 138.43,60.055 139.772,61.397 C7.1@231.202,61.397 ; C7.1@231.202,61.397 231.202,62.795 U4.4@231.116,62.795 230.553,62.795 229.307,61.549 227.701,61.549 227.363,61.887 227.363,64.997 228.237,65.872 254.762,65.872 258.572,62.062 258.572,54.508 258.889,54.19 Ain2.2@261.167,54.19 263.271,54.19 263.271,48.625
  Top Layer w0.2: 91.918,58.291 C12.2@91.918,58.933 ; 91.927,58.261 92.435,58.261 92.438,58.258 93.197,58.258 93.2,58.261 96.918,58.261 97.023,58.156 97.235,58.156
  Top Layer w0.3: VBin_N.1@76.278,56.804 76.278,60.052 ; P2.1@76.278,64.022 76.278,60.052 ; CA1.1@81.278,59.285 77.045,59.285 76.278,60.052 ; CA1.1@81.282,59.289 v1(82.225,59.289) ; v1(84.597,59.491) 84.597,60.775 85.503,61.681 ; J1.6@87.953,65.381 87.953,64.183 87.594,63.824 85.963,63.824 85.503,63.364 J1.5@85.503,62.531 85.503,61.681 ; C12.2@91.918,58.933 90.297,58.933 89.439,58.933 88.138,60.234 86.95,60.234 85.503,61.681
  Top Layer w0.5: VBin_N.1@76.158,56.684 VBin_N.1@76.278,56.804 ; CA1.1@81.278,59.285 CA1.1@81.282,59.289
  Bottom Layer w0.1: v1(-36.609,59.217) -36.599,59.227 -33.215,59.227 v1(-33.204,59.238) ; v1@-33.47,62.805 -32.633,62.805 -32.363,63.075 -30.364,63.075 -30.24,62.951 v1@-30.145,62.951 ; v1(92.448,49.347) 95.641,49.347 95.814,49.52 v1(95.909,49.52)
  Bottom Layer w0.3: v1(82.225,59.289) 83.021,58.493 84.304,58.493 84.597,58.786 v1(84.597,59.491)
HAP1_N: HAP1.1 LS1.N1 U1.2 | length 28.8
  Top Layer w0.127: HAP1.1@-60.877,47.085 -56.736,47.085 LS1.N1@-52.363,51.458 -47.155,51.458 -44.374,54.239 -44.374,57.007 -44.038,57.343 U1.2@-37.926,57.343
HAP1_P: HAP1.2 LS1.P1 U1.3 | length 56.9
  Top Layer w0.127: LS1.P1@-52.363,61.618 -58.623,55.358 -58.623,49.535 HAP1.2@-60.877,49.535 -63.516,49.535 -63.59,49.461 -63.59,45.908 -63.516,45.834 -49.959,45.834 -46.533,49.26 -40.183,49.26 -39.548,49.895 -39.548,55.649 -38.354,56.843 U1.3@-37.926,56.843
HAP2_N: HAP2.1 LS2.N1 U4.2 | length 94
  Top Layer w0.127: v1(230.393,63.735) 230.423,63.765 231.086,63.765 U4.2@231.116,63.795 ; 239.882,53.141 245.967,47.056 HAP2.1@261.119,47.056 267.945,47.056 273.507,52.618 v1(273.507,62.568)
  Bottom Layer w0.127: v1(230.393,63.735) 230.393,64.409 230.713,64.729 271.374,64.729 273.507,62.595 v1(273.507,62.568)
HAP2_P: HAP2.2 LS2.P1 U4.3 | length 53.6
  Top Layer w0.127: U4.3@231.116,63.295 230.168,63.295 228.636,61.762 227.789,61.762 227.576,61.975 227.576,64.289 228.6,65.313 236.502,65.313 238.488,63.327 238.593,63.327 238.609,63.343 240.419,63.343 241.271,64.195 242.44,65.364 250.876,65.364 257.607,58.633 257.607,50.471 258.572,49.506 HAP2.2@261.119,49.506
HAP3_N: LS3.N1 U2.9 | length 23.4
  Top Layer w0.127: U2.9@98.821,50.173 99.92,50.173 99.994,50.247 99.994,51.406 100.779,52.191 102.71,52.191 v1(103.179,51.722) ; v1(113.106,53.03) 117.285,53.03 117.356,52.959
  Bottom Layer w0.127: v1(103.179,51.722) 103.179,49.941 103.253,49.867 107.762,49.867 110.658,52.762 112.786,52.762 113.054,53.03 v1(113.106,53.03)